# EAGLE board USB_Current_Sensor-Panel (EAGLE 9.6.2), part 1 of 2
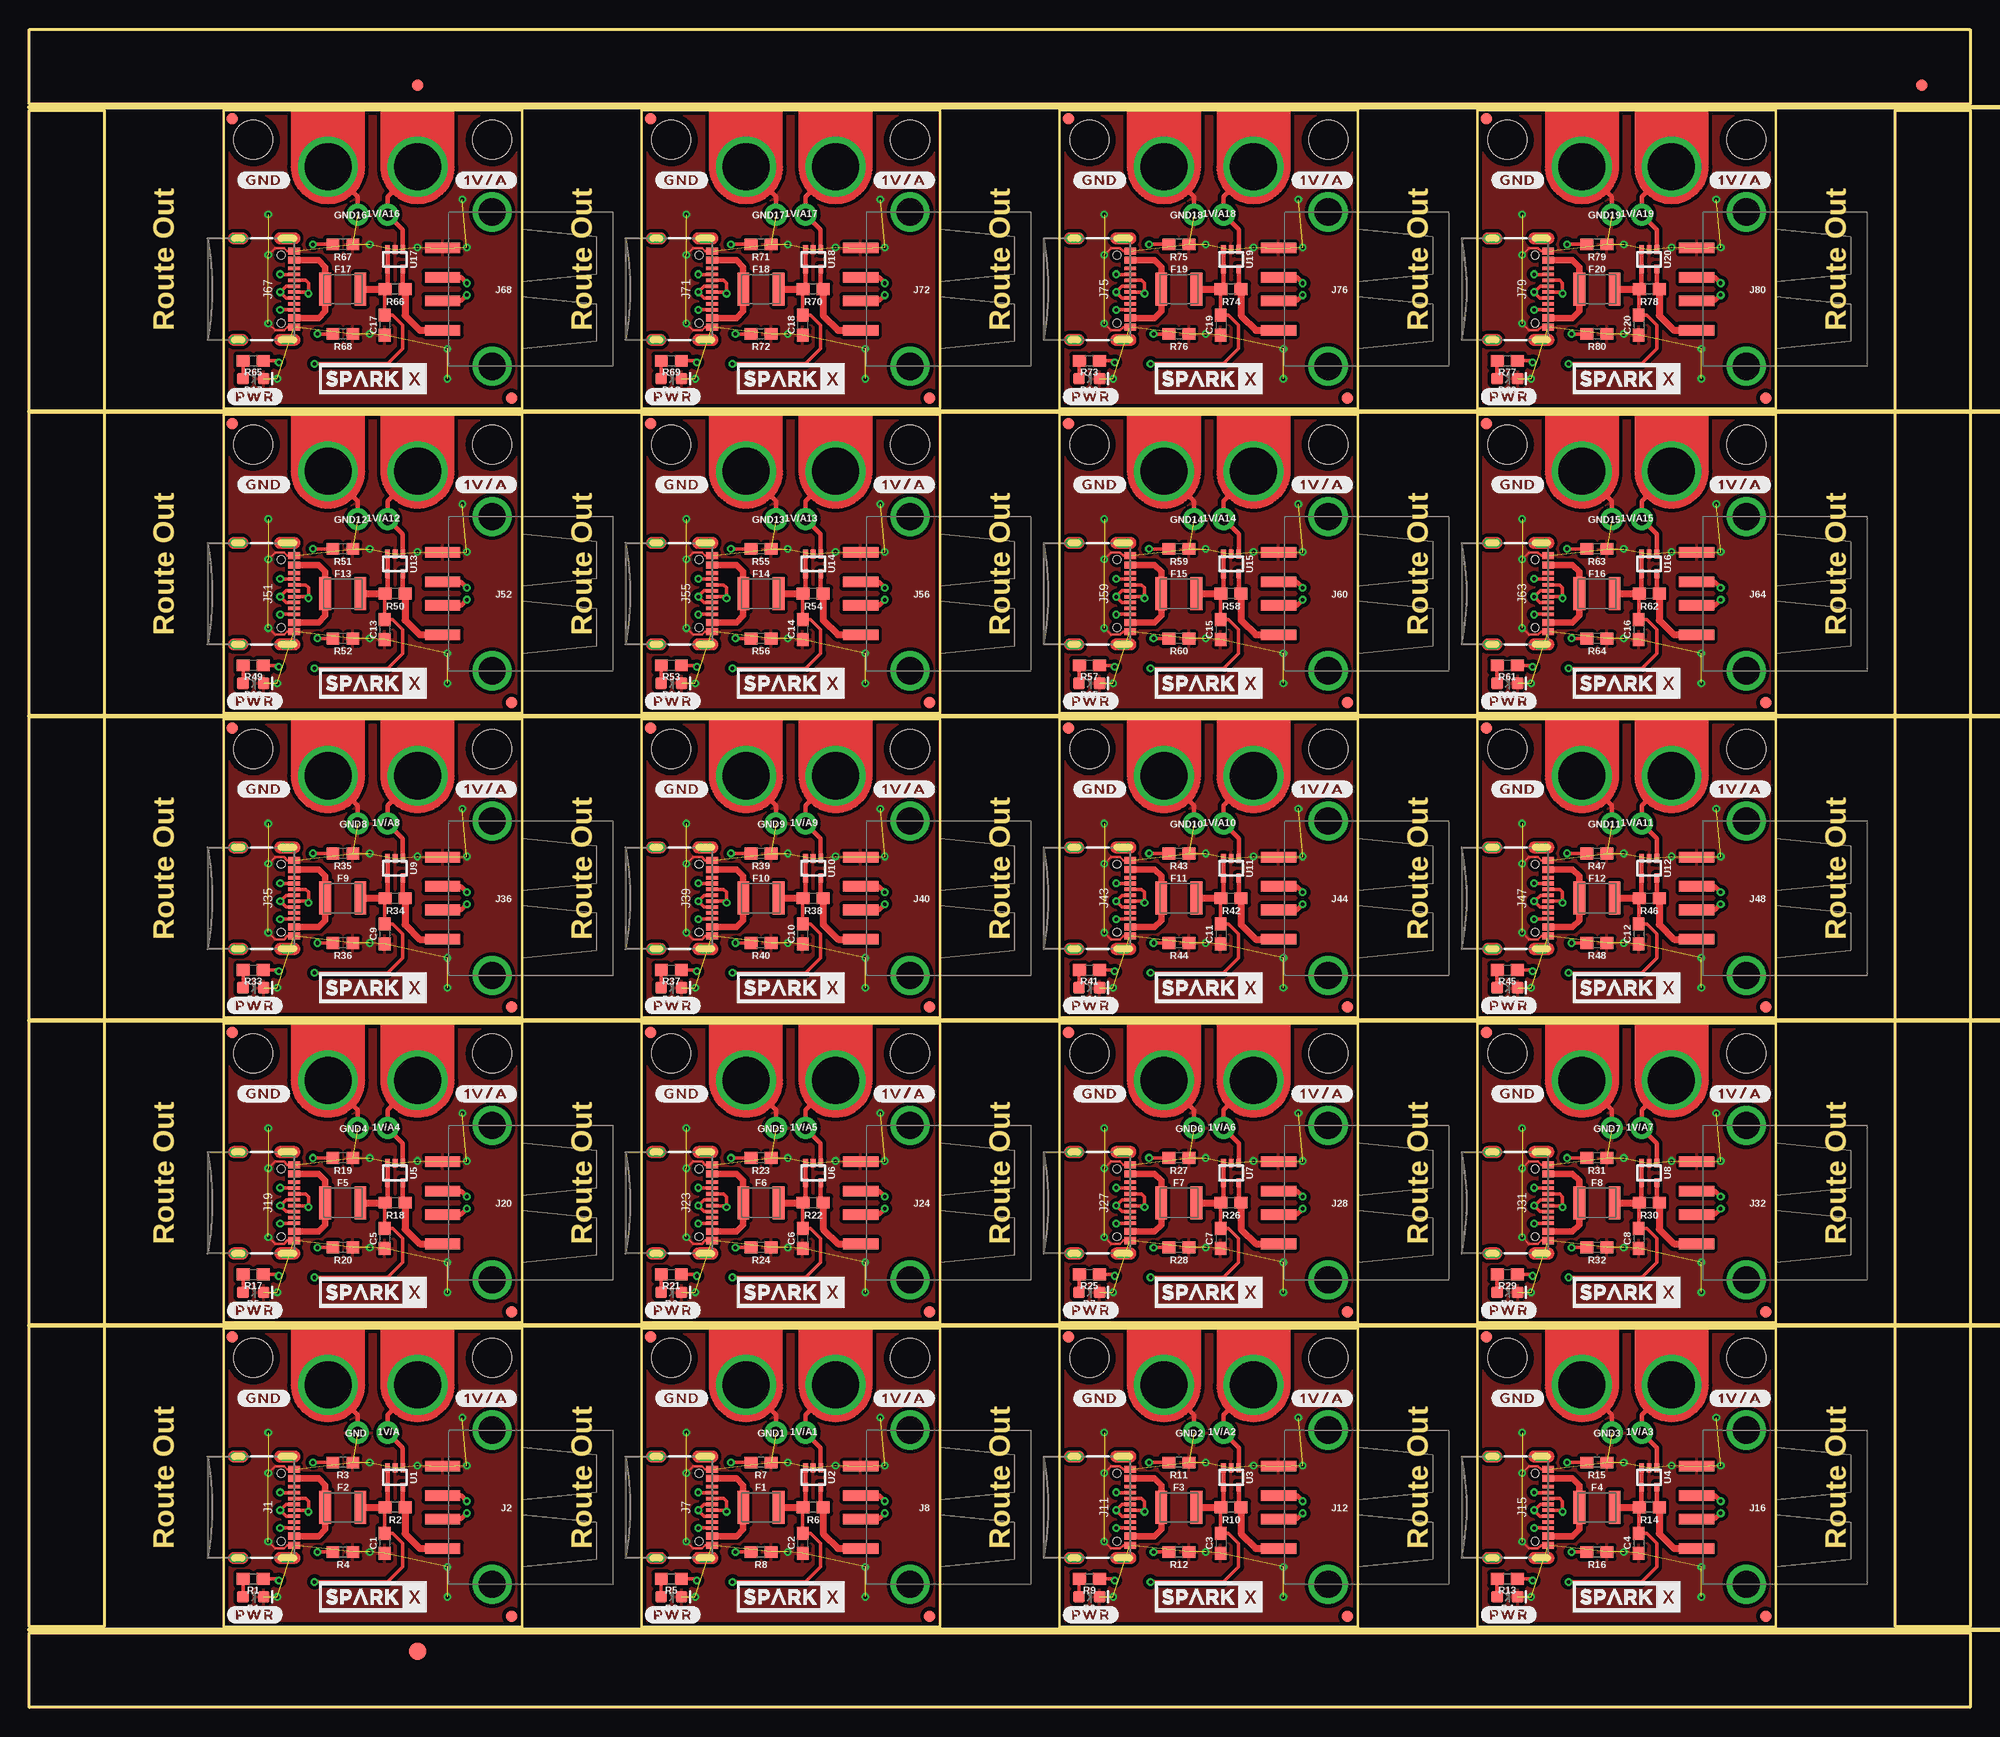
[diagram p0: board, top side]
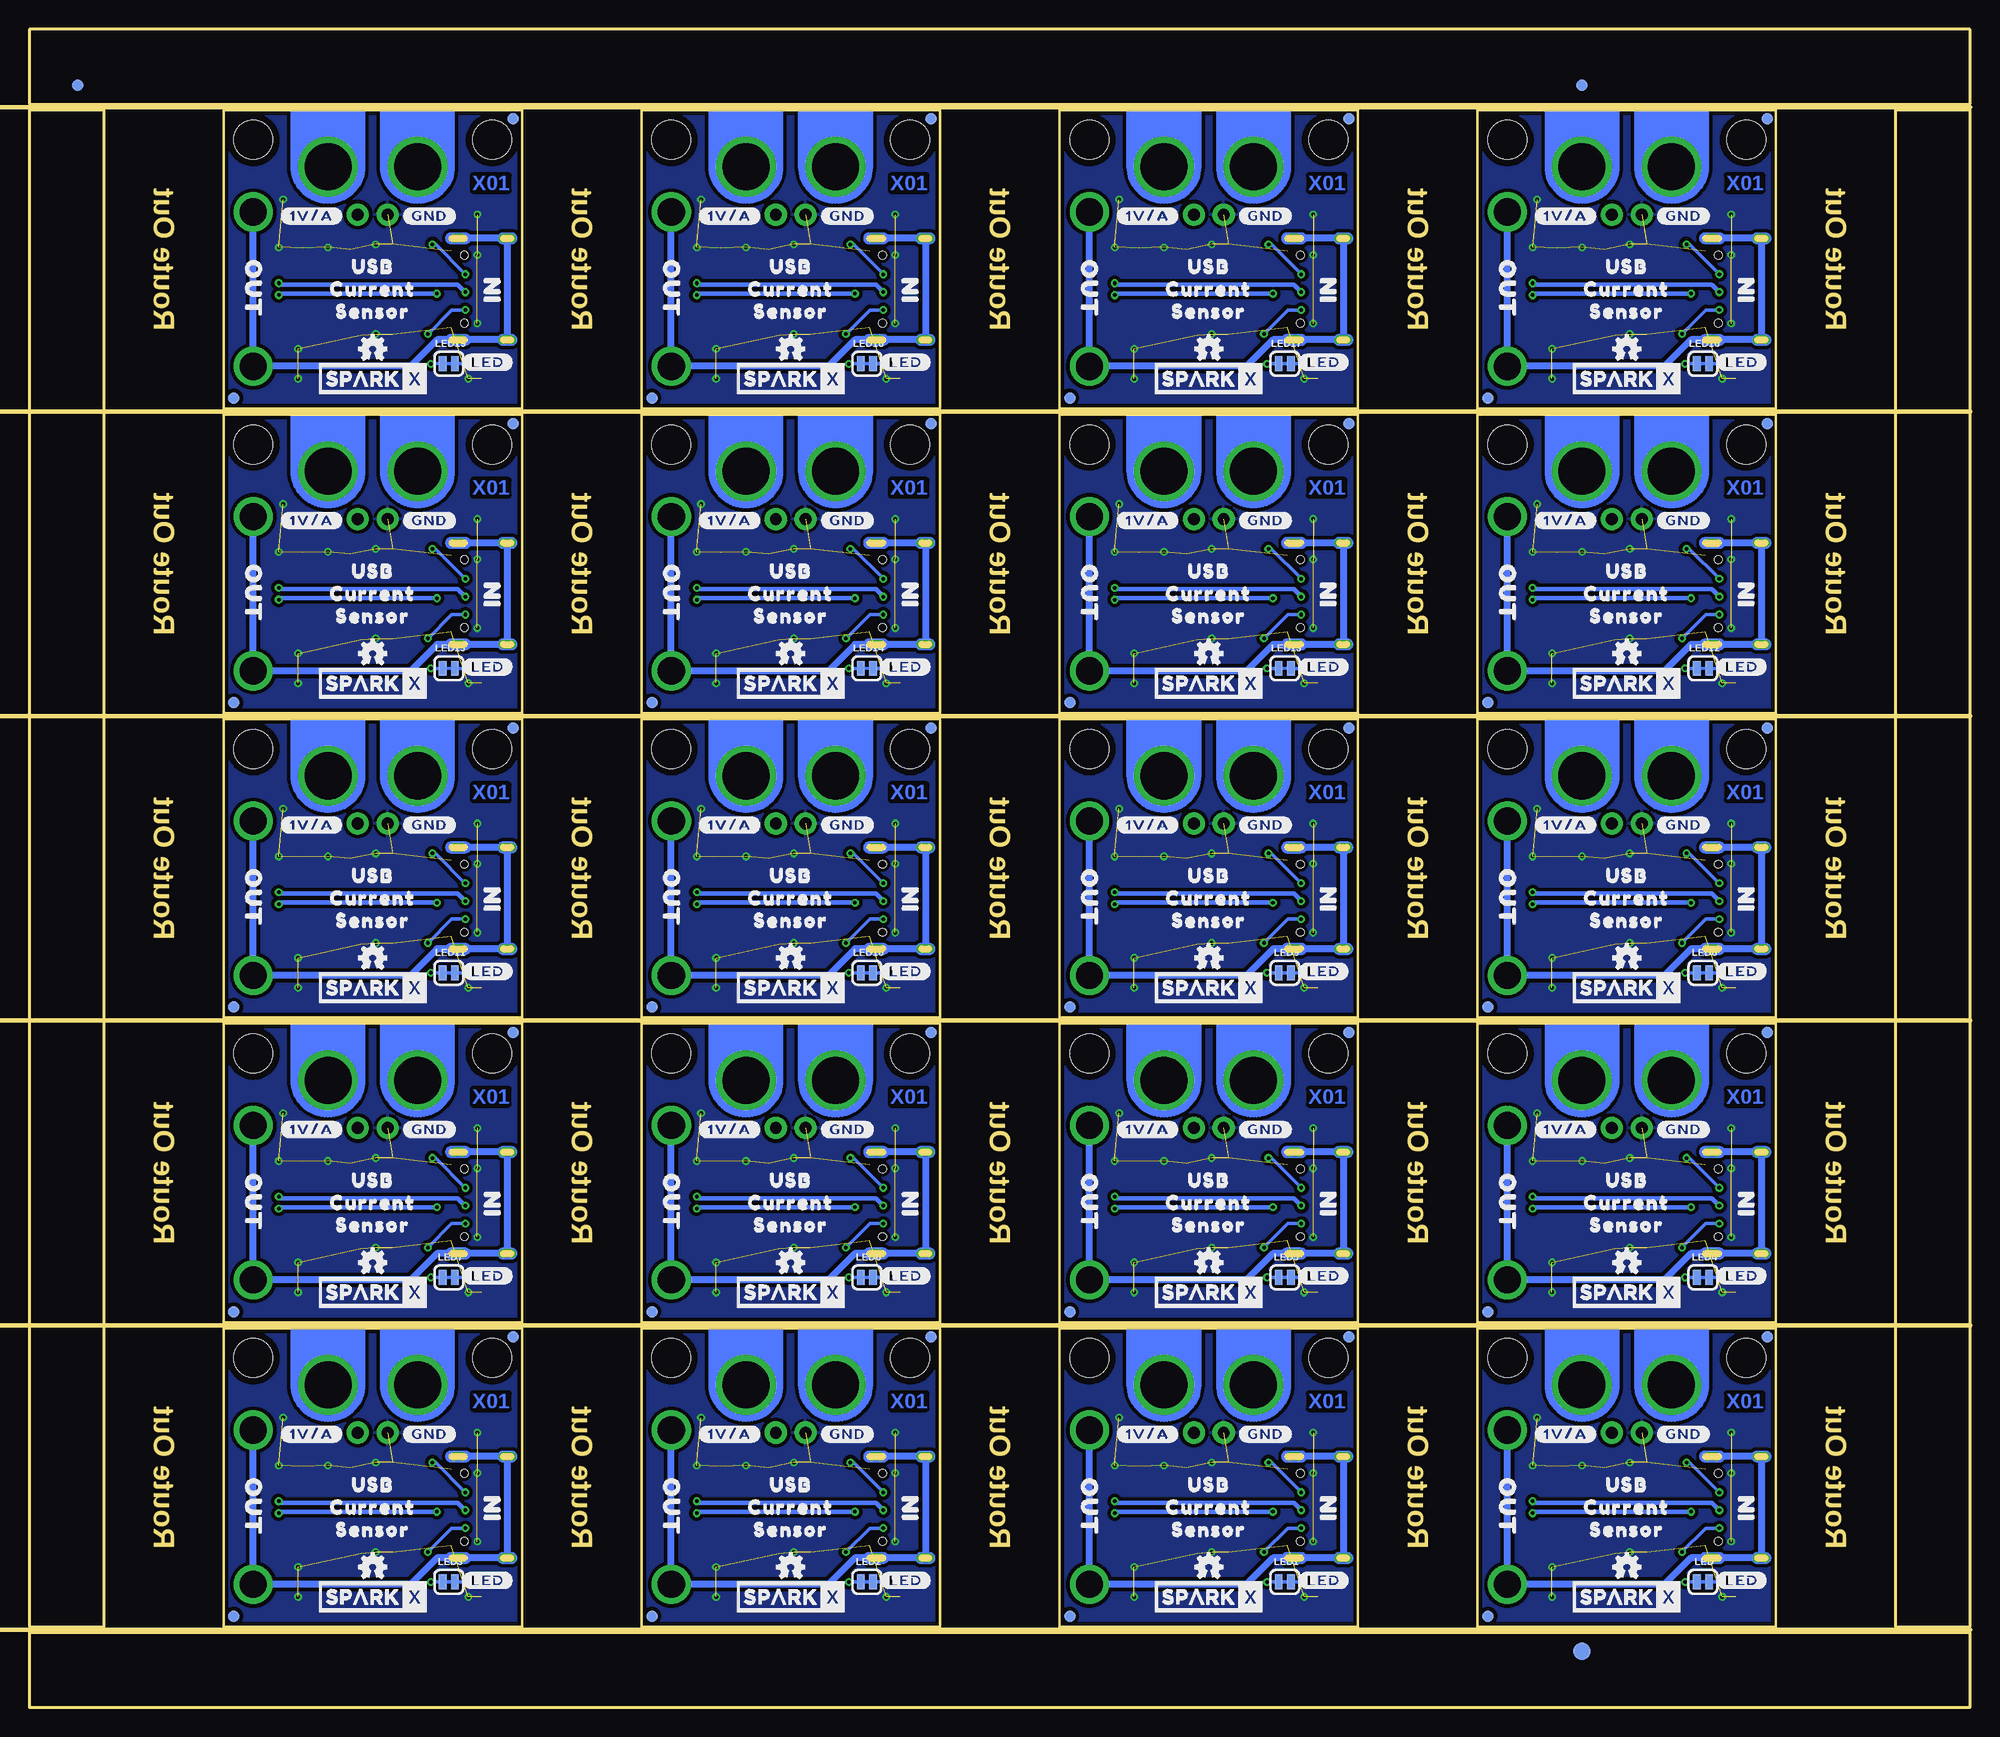
[diagram p1: board, bottom side, seen from below]

Size 165.1 x 142.75 mm. Coordinates in mm from the lower left corner, seen from the top.
Outline: 41.91,32.26 41.91,6.86 16.51,6.86 16.51,32.26 41.91,32.26
Outline: 77.47,32.26 77.47,6.86 52.07,6.86 52.07,32.26 77.47,32.26
Outline: 113.03,32.26 113.03,6.86 87.63,6.86 87.63,32.26 113.03,32.26
Outline: 148.59,32.26 148.59,6.86 123.19,6.86 123.19,32.26 148.59,32.26
Outline: 41.91,58.17 41.91,32.77 16.51,32.77 16.51,58.17 41.91,58.17
Outline: 77.47,58.17 77.47,32.77 52.07,32.77 52.07,58.17 77.47,58.17
Outline: 113.03,58.17 113.03,32.77 87.63,32.77 87.63,58.17 113.03,58.17
Outline: 148.59,58.17 148.59,32.77 123.19,32.77 123.19,58.17 148.59,58.17
Outline: 41.91,84.07 41.91,58.67 16.51,58.67 16.51,84.07 41.91,84.07
Outline: 77.47,84.07 77.47,58.67 52.07,58.67 52.07,84.07 77.47,84.07
Outline: 113.03,84.07 113.03,58.67 87.63,58.67 87.63,84.07 113.03,84.07
Outline: 148.59,84.07 148.59,58.67 123.19,58.67 123.19,84.07 148.59,84.07
Outline: 41.91,109.98 41.91,84.58 16.51,84.58 16.51,109.98 41.91,109.98
Outline: 77.47,109.98 77.47,84.58 52.07,84.58 52.07,109.98 77.47,109.98
Outline: 113.03,109.98 113.03,84.58 87.63,84.58 87.63,109.98 113.03,109.98
Outline: 148.59,109.98 148.59,84.58 123.19,84.58 123.19,109.98 148.59,109.98
Outline: 41.91,135.89 41.91,110.49 16.51,110.49 16.51,135.89 41.91,135.89
Outline: 77.47,135.89 77.47,110.49 52.07,110.49 52.07,135.89 77.47,135.89
Outline: 113.03,135.89 113.03,110.49 87.63,110.49 87.63,135.89 113.03,135.89
Outline: 148.59,135.89 148.59,110.49 123.19,110.49 123.19,135.89 148.59,135.89
Outline: 0,6.35 165.1,6.35 165.1,0 0,0 0,6.35
Outline: 158.75,135.89 165.1,135.89 165.1,6.86 158.75,6.86 158.75,135.89
Outline: 0,142.75 165.1,142.75 165.1,136.4 0,136.4 0,142.75
Outline: 0,135.89 6.35,135.89 6.35,6.86 0,6.86 0,135.89
Copper layers (1*16): Top 0.035mm / dielectric 1.5mm / Bottom 0.035mm
Design rules "USB_Current_Sensor": minimum track width 7mil, minimum drill 0.3mm, track to track 7mil, track to pad 7mil, pad to pad 7mil, via to via 7mil, smd to smd 7mil, copper to edge 7mil, drill to drill 7mil, minimum pad ring 7mil, minimum via ring 7mil, stop-mask expansion 3mil, vias tented up to drill 25mil, thermal gap 10mil
Milling: 6 lines

## Footprints (pad centres in the part's own frame; a part is rotated, then mirrored left to right if it is on the bottom)
1X01_NO_SILK = drill 1.016 pad 1.88: 1 0,0
0603 = smd 1.1 x 1: 1 -0.85,0; 2 0.85,0
LED-0603 = smd 1 x 1: A -0.877,0; C 0.877,0
FIDUCIAL-1X2 = smd 1 x 1: 1 0,0
FIDUCIAL-1.5X3 = smd 1.5 x 1.5: 1 0,0
1210 = smd 1 x 2.8: 1 -1.5,0; 2 1.5,0
USB-C-16P_4LAYER-PADS = smd 0.3 x 1: A5 -1.25,-0.34; A6 -0.25,-0.34; A7 0.25,-0.34; A8 1.25,-0.34; B5 1.75,-0.34; B6 0.75,-0.34; B7 -0.75,-0.34; B8 -1.75,-0.34 | smd 0.6 x 1: GND -3.225,-0.34; GND2 3.225,-0.34; VBUS1 -2.45,-0.34; VBUS2 2.45,-0.34 | drill 0.4 pad 0.6 long: SHLD1 -4.318,-0.915; SHLD2 4.318,-0.915; SHLD3 -4.318,-5.095; SHLD4 4.318,-5.095 | hole 0.65: -2.89,-1.445; 2.89,-1.445
USB-A-S-NOSILK-FEMALE = smd 3 x 0.9: D+ 6.752,-1; D- 6.752,1; GND 6.752,-3.5; VBUS 6.752,3.5 | drill 2.311: SHLD1 2.54,-6.566; SHLD2 2.54,6.566
TAB_GATOR_MINI = drill 4 pad 5.08: P1 0,4.826
STAND-OFF = hole 3.302: 0,0
SMT-JUMPER_2_NC_TRACE_SILK = smd 0.66 x 1.27: 1 -0.521,0; 2 0.521,0
SC70 = smd 0.4 x 0.75: 1 -0.65,-0.825; 2 0,-0.825; 3 0.65,-0.825; 4 0.65,0.825; 5 -0.65,0.825

## Placement (x,y rotation side)
1V/A  [1X01_NO_SILK]  30.48,23.37 180 top
1V/A1  [1X01_NO_SILK]  66.04,23.37 180 top
1V/A2  [1X01_NO_SILK]  101.6,23.37 180 top
1V/A3  [1X01_NO_SILK]  137.16,23.37 180 top
1V/A4  [1X01_NO_SILK]  30.48,49.28 180 top
1V/A5  [1X01_NO_SILK]  66.04,49.28 180 top
1V/A6  [1X01_NO_SILK]  101.6,49.28 180 top
1V/A7  [1X01_NO_SILK]  137.16,49.28 180 top
1V/A8  [1X01_NO_SILK]  30.48,75.18 180 top
1V/A9  [1X01_NO_SILK]  66.04,75.18 180 top
1V/A10  [1X01_NO_SILK]  101.6,75.18 180 top
1V/A11  [1X01_NO_SILK]  137.16,75.18 180 top
1V/A12  [1X01_NO_SILK]  30.48,101.09 180 top
1V/A13  [1X01_NO_SILK]  66.04,101.09 180 top
1V/A14  [1X01_NO_SILK]  101.6,101.09 180 top
1V/A15  [1X01_NO_SILK]  137.16,101.09 180 top
1V/A16  [1X01_NO_SILK]  30.48,127 180 top
1V/A17  [1X01_NO_SILK]  66.04,127 180 top
1V/A18  [1X01_NO_SILK]  101.6,127 180 top
1V/A19  [1X01_NO_SILK]  137.16,127 180 top
C1  0.1uF  [0603]  30.23,13.97 270 top
C2  0.1uF  [0603]  65.79,13.97 270 top
C3  0.1uF  [0603]  101.35,13.97 270 top
C4  0.1uF  [0603]  136.91,13.97 270 top
C5  0.1uF  [0603]  30.23,39.88 270 top
C6  0.1uF  [0603]  65.79,39.88 270 top
C7  0.1uF  [0603]  101.35,39.88 270 top
C8  0.1uF  [0603]  136.91,39.88 270 top
C9  0.1uF  [0603]  30.23,65.79 270 top
C10  0.1uF  [0603]  65.79,65.79 270 top
C11  0.1uF  [0603]  101.35,65.79 270 top
C12  0.1uF  [0603]  136.91,65.79 270 top
C13  0.1uF  [0603]  30.23,91.69 270 top
C14  0.1uF  [0603]  65.79,91.69 270 top
C15  0.1uF  [0603]  101.35,91.69 270 top
C16  0.1uF  [0603]  136.91,91.69 270 top
C17  0.1uF  [0603]  30.23,117.6 270 top
C18  0.1uF  [0603]  65.79,117.6 270 top
C19  0.1uF  [0603]  101.35,117.6 270 top
C20  0.1uF  [0603]  136.91,117.6 270 top
D1  RED  [LED-0603]  19.05,9.4 0 top
D2  RED  [LED-0603]  54.61,9.4 0 top
D3  RED  [LED-0603]  90.17,9.4 0 top
D4  RED  [LED-0603]  125.73,9.4 0 top
D5  RED  [LED-0603]  19.05,35.31 0 top
D6  RED  [LED-0603]  54.61,35.31 0 top
D7  RED  [LED-0603]  90.17,35.31 0 top
D8  RED  [LED-0603]  125.73,35.31 0 top
D9  RED  [LED-0603]  19.05,61.21 0 top
D10  RED  [LED-0603]  54.61,61.21 0 top
D11  RED  [LED-0603]  90.17,61.21 0 top
D12  RED  [LED-0603]  125.73,61.21 0 top
D13  RED  [LED-0603]  19.05,87.12 0 top
D14  RED  [LED-0603]  54.61,87.12 0 top
D15  RED  [LED-0603]  90.17,87.12 0 top
D16  RED  [LED-0603]  125.73,87.12 0 top
D17  RED  [LED-0603]  19.05,113.03 0 top
D18  RED  [LED-0603]  54.61,113.03 0 top
D19  RED  [LED-0603]  90.17,113.03 0 top
D20  RED  [LED-0603]  125.73,113.03 0 top
E$1  [FIDUCIAL-1X2]  33.02,137.99 0 top
E$2  [FIDUCIAL-1X2]  33.02,137.99 0 bottom
E$3  [FIDUCIAL-1X2]  160.97,137.99 0 top
E$4  [FIDUCIAL-1X2]  160.97,137.99 0 bottom
E$5  [FIDUCIAL-1.5X3]  33.02,4.76 0 top
E$6  [FIDUCIAL-1.5X3]  33.02,4.76 0 bottom
F1  6V/2A  [1210]  62.23,17.02 0 top
F2  6V/2A  [1210]  26.67,17.02 0 top
F3  6V/2A  [1210]  97.79,17.02 0 top
F4  6V/2A  [1210]  133.35,17.02 0 top
F5  6V/2A  [1210]  26.67,42.93 0 top
F6  6V/2A  [1210]  62.23,42.93 0 top
F7  6V/2A  [1210]  97.79,42.93 0 top
F8  6V/2A  [1210]  133.35,42.93 0 top
F9  6V/2A  [1210]  26.67,68.83 0 top
F10  6V/2A  [1210]  62.23,68.83 0 top
F11  6V/2A  [1210]  97.79,68.83 0 top
F12  6V/2A  [1210]  133.35,68.83 0 top
F13  6V/2A  [1210]  26.67,94.74 0 top
F14  6V/2A  [1210]  62.23,94.74 0 top
F15  6V/2A  [1210]  97.79,94.74 0 top
F16  6V/2A  [1210]  133.35,94.74 0 top
F17  6V/2A  [1210]  26.67,120.65 0 top
F18  6V/2A  [1210]  62.23,120.65 0 top
F19  6V/2A  [1210]  97.79,120.65 0 top
F20  6V/2A  [1210]  133.35,120.65 0 top
GND  [1X01_NO_SILK]  27.94,23.37 180 top
GND1  [1X01_NO_SILK]  63.5,23.37 180 top
GND2  [1X01_NO_SILK]  99.06,23.37 180 top
GND3  [1X01_NO_SILK]  134.62,23.37 180 top
GND4  [1X01_NO_SILK]  27.94,49.28 180 top
GND5  [1X01_NO_SILK]  63.5,49.28 180 top
GND6  [1X01_NO_SILK]  99.06,49.28 180 top
GND7  [1X01_NO_SILK]  134.62,49.28 180 top
GND8  [1X01_NO_SILK]  27.94,75.18 180 top
GND9  [1X01_NO_SILK]  63.5,75.18 180 top
GND10  [1X01_NO_SILK]  99.06,75.18 180 top
GND11  [1X01_NO_SILK]  134.62,75.18 180 top
GND12  [1X01_NO_SILK]  27.94,101.09 180 top
GND13  [1X01_NO_SILK]  63.5,101.09 180 top
GND14  [1X01_NO_SILK]  99.06,101.09 180 top
GND15  [1X01_NO_SILK]  134.62,101.09 180 top
GND16  [1X01_NO_SILK]  27.94,127 180 top
GND17  [1X01_NO_SILK]  63.5,127 180 top
GND18  [1X01_NO_SILK]  99.06,127 180 top
GND19  [1X01_NO_SILK]  134.62,127 180 top
J1  [USB-C-16P_4LAYER-PADS]  22.86,17.02 270 top
J2  USB_A_FEMALE  [USB-A-S-NOSILK-FEMALE]  41.91,17.02 180 top
J3  TAB_GATOR_MINI  [TAB_GATOR_MINI]  33.02,32.26 180 top
J4  TAB_GATOR_MINI  [TAB_GATOR_MINI]  25.4,32.26 180 top
J5  TAB_GATOR_MINI  [TAB_GATOR_MINI]  68.58,32.26 180 top
J6  TAB_GATOR_MINI  [TAB_GATOR_MINI]  60.96,32.26 180 top
J7  [USB-C-16P_4LAYER-PADS]  58.42,17.02 270 top
J8  USB_A_FEMALE  [USB-A-S-NOSILK-FEMALE]  77.47,17.02 180 top
J9  TAB_GATOR_MINI  [TAB_GATOR_MINI]  104.14,32.26 180 top
J10  TAB_GATOR_MINI  [TAB_GATOR_MINI]  96.52,32.26 180 top
J11  [USB-C-16P_4LAYER-PADS]  93.98,17.02 270 top
J12  USB_A_FEMALE  [USB-A-S-NOSILK-FEMALE]  113.03,17.02 180 top
J13  TAB_GATOR_MINI  [TAB_GATOR_MINI]  139.7,32.26 180 top
J14  TAB_GATOR_MINI  [TAB_GATOR_MINI]  132.08,32.26 180 top
J15  [USB-C-16P_4LAYER-PADS]  129.54,17.02 270 top
J16  USB_A_FEMALE  [USB-A-S-NOSILK-FEMALE]  148.59,17.02 180 top
J17  TAB_GATOR_MINI  [TAB_GATOR_MINI]  33.02,58.17 180 top
J18  TAB_GATOR_MINI  [TAB_GATOR_MINI]  25.4,58.17 180 top
J19  [USB-C-16P_4LAYER-PADS]  22.86,42.93 270 top
J20  USB_A_FEMALE  [USB-A-S-NOSILK-FEMALE]  41.91,42.93 180 top
J21  TAB_GATOR_MINI  [TAB_GATOR_MINI]  68.58,58.17 180 top
J22  TAB_GATOR_MINI  [TAB_GATOR_MINI]  60.96,58.17 180 top
J23  [USB-C-16P_4LAYER-PADS]  58.42,42.93 270 top
J24  USB_A_FEMALE  [USB-A-S-NOSILK-FEMALE]  77.47,42.93 180 top
J25  TAB_GATOR_MINI  [TAB_GATOR_MINI]  104.14,58.17 180 top
J26  TAB_GATOR_MINI  [TAB_GATOR_MINI]  96.52,58.17 180 top
J27  [USB-C-16P_4LAYER-PADS]  93.98,42.93 270 top
J28  USB_A_FEMALE  [USB-A-S-NOSILK-FEMALE]  113.03,42.93 180 top
J29  TAB_GATOR_MINI  [TAB_GATOR_MINI]  139.7,58.17 180 top
J30  TAB_GATOR_MINI  [TAB_GATOR_MINI]  132.08,58.17 180 top
J31  [USB-C-16P_4LAYER-PADS]  129.54,42.93 270 top
J32  USB_A_FEMALE  [USB-A-S-NOSILK-FEMALE]  148.59,42.93 180 top
J33  TAB_GATOR_MINI  [TAB_GATOR_MINI]  33.02,84.07 180 top
J34  TAB_GATOR_MINI  [TAB_GATOR_MINI]  25.4,84.07 180 top
J35  [USB-C-16P_4LAYER-PADS]  22.86,68.83 270 top
J36  USB_A_FEMALE  [USB-A-S-NOSILK-FEMALE]  41.91,68.83 180 top
J37  TAB_GATOR_MINI  [TAB_GATOR_MINI]  68.58,84.07 180 top
J38  TAB_GATOR_MINI  [TAB_GATOR_MINI]  60.96,84.07 180 top
J39  [USB-C-16P_4LAYER-PADS]  58.42,68.83 270 top
J40  USB_A_FEMALE  [USB-A-S-NOSILK-FEMALE]  77.47,68.83 180 top
J41  TAB_GATOR_MINI  [TAB_GATOR_MINI]  104.14,84.07 180 top
J42  TAB_GATOR_MINI  [TAB_GATOR_MINI]  96.52,84.07 180 top
J43  [USB-C-16P_4LAYER-PADS]  93.98,68.83 270 top
J44  USB_A_FEMALE  [USB-A-S-NOSILK-FEMALE]  113.03,68.83 180 top
J45  TAB_GATOR_MINI  [TAB_GATOR_MINI]  139.7,84.07 180 top
J46  TAB_GATOR_MINI  [TAB_GATOR_MINI]  132.08,84.07 180 top
J47  [USB-C-16P_4LAYER-PADS]  129.54,68.83 270 top
J48  USB_A_FEMALE  [USB-A-S-NOSILK-FEMALE]  148.59,68.83 180 top
J49  TAB_GATOR_MINI  [TAB_GATOR_MINI]  33.02,109.98 180 top
J50  TAB_GATOR_MINI  [TAB_GATOR_MINI]  25.4,109.98 180 top
J51  [USB-C-16P_4LAYER-PADS]  22.86,94.74 270 top
J52  USB_A_FEMALE  [USB-A-S-NOSILK-FEMALE]  41.91,94.74 180 top
J53  TAB_GATOR_MINI  [TAB_GATOR_MINI]  68.58,109.98 180 top
J54  TAB_GATOR_MINI  [TAB_GATOR_MINI]  60.96,109.98 180 top
J55  [USB-C-16P_4LAYER-PADS]  58.42,94.74 270 top
J56  USB_A_FEMALE  [USB-A-S-NOSILK-FEMALE]  77.47,94.74 180 top
J57  TAB_GATOR_MINI  [TAB_GATOR_MINI]  104.14,109.98 180 top
J58  TAB_GATOR_MINI  [TAB_GATOR_MINI]  96.52,109.98 180 top
J59  [USB-C-16P_4LAYER-PADS]  93.98,94.74 270 top
J60  USB_A_FEMALE  [USB-A-S-NOSILK-FEMALE]  113.03,94.74 180 top
J61  TAB_GATOR_MINI  [TAB_GATOR_MINI]  139.7,109.98 180 top
J62  TAB_GATOR_MINI  [TAB_GATOR_MINI]  132.08,109.98 180 top
J63  [USB-C-16P_4LAYER-PADS]  129.54,94.74 270 top
J64  USB_A_FEMALE  [USB-A-S-NOSILK-FEMALE]  148.59,94.74 180 top
J65  TAB_GATOR_MINI  [TAB_GATOR_MINI]  33.02,135.89 180 top
J66  TAB_GATOR_MINI  [TAB_GATOR_MINI]  25.4,135.89 180 top
J67  [USB-C-16P_4LAYER-PADS]  22.86,120.65 270 top
J68  USB_A_FEMALE  [USB-A-S-NOSILK-FEMALE]  41.91,120.65 180 top
J69  TAB_GATOR_MINI  [TAB_GATOR_MINI]  68.58,135.89 180 top
J70  TAB_GATOR_MINI  [TAB_GATOR_MINI]  60.96,135.89 180 top
J71  [USB-C-16P_4LAYER-PADS]  58.42,120.65 270 top
J72  USB_A_FEMALE  [USB-A-S-NOSILK-FEMALE]  77.47,120.65 180 top
J73  TAB_GATOR_MINI  [TAB_GATOR_MINI]  104.14,135.89 180 top
J74  TAB_GATOR_MINI  [TAB_GATOR_MINI]  96.52,135.89 180 top
J75  [USB-C-16P_4LAYER-PADS]  93.98,120.65 270 top
J76  USB_A_FEMALE  [USB-A-S-NOSILK-FEMALE]  113.03,120.65 180 top
J77  TAB_GATOR_MINI  [TAB_GATOR_MINI]  139.7,135.89 180 top
J78  TAB_GATOR_MINI  [TAB_GATOR_MINI]  132.08,135.89 180 top
J79  [USB-C-16P_4LAYER-PADS]  129.54,120.65 270 top
J80  USB_A_FEMALE  [USB-A-S-NOSILK-FEMALE]  148.59,120.65 180 top
JP1  FIDUCIAL1X2  [FIDUCIAL-1X2]  17.27,31.5 0 bottom
JP2  FIDUCIAL1X2  [FIDUCIAL-1X2]  41.02,7.75 0 top
JP3  STAND-OFF  [STAND-OFF]  39.37,29.72 180 top
JP4  STAND-OFF  [STAND-OFF]  19.05,29.72 180 top
JP5  FIDUCIAL1X2  [FIDUCIAL-1X2]  41.02,7.75 0 bottom
JP6  FIDUCIAL1X2  [FIDUCIAL-1X2]  17.27,31.5 0 top
JP7  STAND-OFF  [STAND-OFF]  74.93,29.72 180 top
JP8  STAND-OFF  [STAND-OFF]  54.61,29.72 180 top
JP9  FIDUCIAL1X2  [FIDUCIAL-1X2]  76.58,7.75 0 top
JP10  FIDUCIAL1X2  [FIDUCIAL-1X2]  52.83,31.5 0 top
JP11  FIDUCIAL1X2  [FIDUCIAL-1X2]  52.83,31.5 0 bottom
JP12  FIDUCIAL1X2  [FIDUCIAL-1X2]  76.58,7.75 0 bottom
JP13  STAND-OFF  [STAND-OFF]  110.49,29.72 180 top
JP14  STAND-OFF  [STAND-OFF]  90.17,29.72 180 top
JP15  FIDUCIAL1X2  [FIDUCIAL-1X2]  112.14,7.75 0 top
JP16  FIDUCIAL1X2  [FIDUCIAL-1X2]  88.39,31.5 0 top
JP17  FIDUCIAL1X2  [FIDUCIAL-1X2]  88.39,31.5 0 bottom
JP18  FIDUCIAL1X2  [FIDUCIAL-1X2]  112.14,7.75 0 bottom
JP19  STAND-OFF  [STAND-OFF]  146.05,29.72 180 top
JP20  STAND-OFF  [STAND-OFF]  125.73,29.72 180 top
JP21  FIDUCIAL1X2  [FIDUCIAL-1X2]  147.7,7.75 0 top
JP22  FIDUCIAL1X2  [FIDUCIAL-1X2]  123.95,31.5 0 top
JP23  FIDUCIAL1X2  [FIDUCIAL-1X2]  123.95,31.5 0 bottom
JP24  FIDUCIAL1X2  [FIDUCIAL-1X2]  147.7,7.75 0 bottom
JP25  STAND-OFF  [STAND-OFF]  39.37,55.63 180 top
JP26  STAND-OFF  [STAND-OFF]  19.05,55.63 180 top
JP27  FIDUCIAL1X2  [FIDUCIAL-1X2]  41.02,33.66 0 top
JP28  FIDUCIAL1X2  [FIDUCIAL-1X2]  17.27,57.4 0 top
JP29  FIDUCIAL1X2  [FIDUCIAL-1X2]  17.27,57.4 0 bottom
JP30  FIDUCIAL1X2  [FIDUCIAL-1X2]  41.02,33.66 0 bottom
JP31  STAND-OFF  [STAND-OFF]  74.93,55.63 180 top
JP32  STAND-OFF  [STAND-OFF]  54.61,55.63 180 top
JP33  FIDUCIAL1X2  [FIDUCIAL-1X2]  76.58,33.66 0 top
JP34  FIDUCIAL1X2  [FIDUCIAL-1X2]  52.83,57.4 0 top
JP35  FIDUCIAL1X2  [FIDUCIAL-1X2]  52.83,57.4 0 bottom
JP36  FIDUCIAL1X2  [FIDUCIAL-1X2]  76.58,33.66 0 bottom
JP37  STAND-OFF  [STAND-OFF]  110.49,55.63 180 top
JP38  STAND-OFF  [STAND-OFF]  90.17,55.63 180 top
JP39  FIDUCIAL1X2  [FIDUCIAL-1X2]  112.14,33.66 0 top
JP40  FIDUCIAL1X2  [FIDUCIAL-1X2]  88.39,57.4 0 top
JP41  FIDUCIAL1X2  [FIDUCIAL-1X2]  88.39,57.4 0 bottom
JP42  FIDUCIAL1X2  [FIDUCIAL-1X2]  112.14,33.66 0 bottom
JP43  STAND-OFF  [STAND-OFF]  146.05,55.63 180 top
JP44  STAND-OFF  [STAND-OFF]  125.73,55.63 180 top
JP45  FIDUCIAL1X2  [FIDUCIAL-1X2]  147.7,33.66 0 top
JP46  FIDUCIAL1X2  [FIDUCIAL-1X2]  123.95,57.4 0 top
JP47  FIDUCIAL1X2  [FIDUCIAL-1X2]  123.95,57.4 0 bottom
JP48  FIDUCIAL1X2  [FIDUCIAL-1X2]  147.7,33.66 0 bottom
JP49  STAND-OFF  [STAND-OFF]  39.37,81.53 180 top
JP50  STAND-OFF  [STAND-OFF]  19.05,81.53 180 top
JP51  FIDUCIAL1X2  [FIDUCIAL-1X2]  41.02,59.56 0 top
JP52  FIDUCIAL1X2  [FIDUCIAL-1X2]  17.27,83.31 0 top
JP53  FIDUCIAL1X2  [FIDUCIAL-1X2]  17.27,83.31 0 bottom
JP54  FIDUCIAL1X2  [FIDUCIAL-1X2]  41.02,59.56 0 bottom
JP55  STAND-OFF  [STAND-OFF]  74.93,81.53 180 top
JP56  STAND-OFF  [STAND-OFF]  54.61,81.53 180 top
JP57  FIDUCIAL1X2  [FIDUCIAL-1X2]  76.58,59.56 0 top
JP58  FIDUCIAL1X2  [FIDUCIAL-1X2]  52.83,83.31 0 top
JP59  FIDUCIAL1X2  [FIDUCIAL-1X2]  52.83,83.31 0 bottom
JP60  FIDUCIAL1X2  [FIDUCIAL-1X2]  76.58,59.56 0 bottom
JP61  STAND-OFF  [STAND-OFF]  110.49,81.53 180 top
JP62  STAND-OFF  [STAND-OFF]  90.17,81.53 180 top
JP63  FIDUCIAL1X2  [FIDUCIAL-1X2]  112.14,59.56 0 top
JP64  FIDUCIAL1X2  [FIDUCIAL-1X2]  88.39,83.31 0 top
JP65  FIDUCIAL1X2  [FIDUCIAL-1X2]  88.39,83.31 0 bottom
JP66  FIDUCIAL1X2  [FIDUCIAL-1X2]  112.14,59.56 0 bottom
JP67  STAND-OFF  [STAND-OFF]  146.05,81.53 180 top
JP68  STAND-OFF  [STAND-OFF]  125.73,81.53 180 top
JP69  FIDUCIAL1X2  [FIDUCIAL-1X2]  147.7,59.56 0 top
JP70  FIDUCIAL1X2  [FIDUCIAL-1X2]  123.95,83.31 0 top
JP71  FIDUCIAL1X2  [FIDUCIAL-1X2]  123.95,83.31 0 bottom
JP72  FIDUCIAL1X2  [FIDUCIAL-1X2]  147.7,59.56 0 bottom
JP73  STAND-OFF  [STAND-OFF]  39.37,107.44 180 top
JP74  STAND-OFF  [STAND-OFF]  19.05,107.44 180 top
JP75  FIDUCIAL1X2  [FIDUCIAL-1X2]  41.02,85.47 0 top
JP76  FIDUCIAL1X2  [FIDUCIAL-1X2]  17.27,109.22 0 top
JP77  FIDUCIAL1X2  [FIDUCIAL-1X2]  17.27,109.22 0 bottom
JP78  FIDUCIAL1X2  [FIDUCIAL-1X2]  41.02,85.47 0 bottom
JP79  STAND-OFF  [STAND-OFF]  74.93,107.44 180 top
JP80  STAND-OFF  [STAND-OFF]  54.61,107.44 180 top
JP81  FIDUCIAL1X2  [FIDUCIAL-1X2]  76.58,85.47 0 top
JP82  FIDUCIAL1X2  [FIDUCIAL-1X2]  52.83,109.22 0 top
JP83  FIDUCIAL1X2  [FIDUCIAL-1X2]  52.83,109.22 0 bottom
JP84  FIDUCIAL1X2  [FIDUCIAL-1X2]  76.58,85.47 0 bottom
JP85  STAND-OFF  [STAND-OFF]  110.49,107.44 180 top
JP86  STAND-OFF  [STAND-OFF]  90.17,107.44 180 top
JP87  FIDUCIAL1X2  [FIDUCIAL-1X2]  112.14,85.47 0 top
JP88  FIDUCIAL1X2  [FIDUCIAL-1X2]  88.39,109.22 0 top
JP89  FIDUCIAL1X2  [FIDUCIAL-1X2]  88.39,109.22 0 bottom
JP90  FIDUCIAL1X2  [FIDUCIAL-1X2]  112.14,85.47 0 bottom
JP91  STAND-OFF  [STAND-OFF]  146.05,107.44 180 top
JP92  STAND-OFF  [STAND-OFF]  125.73,107.44 180 top
JP93  FIDUCIAL1X2  [FIDUCIAL-1X2]  147.7,85.47 0 top
JP94  FIDUCIAL1X2  [FIDUCIAL-1X2]  123.95,109.22 0 top
JP95  FIDUCIAL1X2  [FIDUCIAL-1X2]  123.95,109.22 0 bottom
JP96  FIDUCIAL1X2  [FIDUCIAL-1X2]  147.7,85.47 0 bottom
JP97  STAND-OFF  [STAND-OFF]  39.37,133.35 180 top
JP98  STAND-OFF  [STAND-OFF]  19.05,133.35 180 top
JP99  FIDUCIAL1X2  [FIDUCIAL-1X2]  41.02,111.38 0 top
JP100  FIDUCIAL1X2  [FIDUCIAL-1X2]  17.27,135.13 0 top
JP101  FIDUCIAL1X2  [FIDUCIAL-1X2]  17.27,135.13 0 bottom
JP102  FIDUCIAL1X2  [FIDUCIAL-1X2]  41.02,111.38 0 bottom
JP103  STAND-OFF  [STAND-OFF]  74.93,133.35 180 top
JP104  STAND-OFF  [STAND-OFF]  54.61,133.35 180 top
JP105  FIDUCIAL1X2  [FIDUCIAL-1X2]  76.58,111.38 0 top
JP106  FIDUCIAL1X2  [FIDUCIAL-1X2]  52.83,135.13 0 top
JP107  FIDUCIAL1X2  [FIDUCIAL-1X2]  52.83,135.13 0 bottom
JP108  FIDUCIAL1X2  [FIDUCIAL-1X2]  76.58,111.38 0 bottom
JP109  STAND-OFF  [STAND-OFF]  110.49,133.35 180 top
JP110  STAND-OFF  [STAND-OFF]  90.17,133.35 180 top
JP111  FIDUCIAL1X2  [FIDUCIAL-1X2]  112.14,111.38 0 top
JP112  FIDUCIAL1X2  [FIDUCIAL-1X2]  88.39,135.13 0 top
JP113  FIDUCIAL1X2  [FIDUCIAL-1X2]  88.39,135.13 0 bottom
JP114  FIDUCIAL1X2  [FIDUCIAL-1X2]  112.14,111.38 0 bottom
JP115  STAND-OFF  [STAND-OFF]  146.05,133.35 180 top
JP116  STAND-OFF  [STAND-OFF]  125.73,133.35 180 top
JP117  FIDUCIAL1X2  [FIDUCIAL-1X2]  147.7,111.38 0 top
JP118  FIDUCIAL1X2  [FIDUCIAL-1X2]  123.95,135.13 0 top
JP119  FIDUCIAL1X2  [FIDUCIAL-1X2]  123.95,135.13 0 bottom
JP120  FIDUCIAL1X2  [FIDUCIAL-1X2]  147.7,111.38 0 bottom
LED  [SMT-JUMPER_2_NC_TRACE_SILK]  22.73,10.67 180 bottom
LED1  [SMT-JUMPER_2_NC_TRACE_SILK]  58.29,10.67 180 bottom
LED2  [SMT-JUMPER_2_NC_TRACE_SILK]  93.85,10.67 180 bottom
LED3  [SMT-JUMPER_2_NC_TRACE_SILK]  129.41,10.67 180 bottom
LED4  [SMT-JUMPER_2_NC_TRACE_SILK]  22.73,36.58 180 bottom
LED5  [SMT-JUMPER_2_NC_TRACE_SILK]  58.29,36.58 180 bottom
LED6  [SMT-JUMPER_2_NC_TRACE_SILK]  93.85,36.58 180 bottom
LED7  [SMT-JUMPER_2_NC_TRACE_SILK]  129.41,36.58 180 bottom
LED8  [SMT-JUMPER_2_NC_TRACE_SILK]  22.73,62.48 180 bottom
LED9  [SMT-JUMPER_2_NC_TRACE_SILK]  58.29,62.48 180 bottom
LED10  [SMT-JUMPER_2_NC_TRACE_SILK]  93.85,62.48 180 bottom
LED11  [SMT-JUMPER_2_NC_TRACE_SILK]  129.41,62.48 180 bottom
LED12  [SMT-JUMPER_2_NC_TRACE_SILK]  22.73,88.39 180 bottom
LED13  [SMT-JUMPER_2_NC_TRACE_SILK]  58.29,88.39 180 bottom
LED14  [SMT-JUMPER_2_NC_TRACE_SILK]  93.85,88.39 180 bottom
LED15  [SMT-JUMPER_2_NC_TRACE_SILK]  129.41,88.39 180 bottom
LED16  [SMT-JUMPER_2_NC_TRACE_SILK]  22.73,114.3 180 bottom
LED17  [SMT-JUMPER_2_NC_TRACE_SILK]  58.29,114.3 180 bottom
LED18  [SMT-JUMPER_2_NC_TRACE_SILK]  93.85,114.3 180 bottom
LED19  [SMT-JUMPER_2_NC_TRACE_SILK]  129.41,114.3 180 bottom
LOGO1  OSHW-LOGOMINI  [OSHW-LOGO-MINI]  29.21,11.94 0 bottom
LOGO2  OSHW-LOGOMINI  [OSHW-LOGO-MINI]  64.77,11.94 0 bottom
LOGO3  OSHW-LOGOMINI  [OSHW-LOGO-MINI]  100.33,11.94 0 bottom
LOGO4  OSHW-LOGOMINI  [OSHW-LOGO-MINI]  135.89,11.94 0 bottom
LOGO5  OSHW-LOGOMINI  [OSHW-LOGO-MINI]  29.21,37.85 0 bottom
LOGO6  OSHW-LOGOMINI  [OSHW-LOGO-MINI]  64.77,37.85 0 bottom
LOGO7  OSHW-LOGOMINI  [OSHW-LOGO-MINI]  100.33,37.85 0 bottom
LOGO8  OSHW-LOGOMINI  [OSHW-LOGO-MINI]  135.89,37.85 0 bottom
LOGO9  OSHW-LOGOMINI  [OSHW-LOGO-MINI]  29.21,63.75 0 bottom
LOGO10  OSHW-LOGOMINI  [OSHW-LOGO-MINI]  64.77,63.75 0 bottom
LOGO11  OSHW-LOGOMINI  [OSHW-LOGO-MINI]  100.33,63.75 0 bottom
LOGO12  OSHW-LOGOMINI  [OSHW-LOGO-MINI]  135.89,63.75 0 bottom
LOGO13  OSHW-LOGOMINI  [OSHW-LOGO-MINI]  29.21,89.66 0 bottom
LOGO14  OSHW-LOGOMINI  [OSHW-LOGO-MINI]  64.77,89.66 0 bottom
LOGO15  OSHW-LOGOMINI  [OSHW-LOGO-MINI]  100.33,89.66 0 bottom
LOGO16  OSHW-LOGOMINI  [OSHW-LOGO-MINI]  135.89,89.66 0 bottom
LOGO17  OSHW-LOGOMINI  [OSHW-LOGO-MINI]  29.21,115.57 0 bottom
LOGO18  OSHW-LOGOMINI  [OSHW-LOGO-MINI]  64.77,115.57 0 bottom
LOGO19  OSHW-LOGOMINI  [OSHW-LOGO-MINI]  100.33,115.57 0 bottom
LOGO20  OSHW-LOGOMINI  [OSHW-LOGO-MINI]  135.89,115.57 0 bottom
R1  2.2k  [0603]  19.05,10.92 0 top
R2  0.05  [0603]  31.12,17.02 180 top
R3  5.1k  [0603]  26.67,20.83 180 top
R4  5.1k  [0603]  26.67,13.21 180 top
R5  2.2k  [0603]  54.61,10.92 0 top
R6  0.05  [0603]  66.67,17.02 180 top
R7  5.1k  [0603]  62.23,20.83 180 top
R8  5.1k  [0603]  62.23,13.21 180 top
R9  2.2k  [0603]  90.17,10.92 0 top
R10  0.05  [0603]  102.23,17.02 180 top
R11  5.1k  [0603]  97.79,20.83 180 top
R12  5.1k  [0603]  97.79,13.21 180 top
R13  2.2k  [0603]  125.73,10.92 0 top
R14  0.05  [0603]  137.79,17.02 180 top
R15  5.1k  [0603]  133.35,20.83 180 top
R16  5.1k  [0603]  133.35,13.21 180 top
R17  2.2k  [0603]  19.05,36.83 0 top
R18  0.05  [0603]  31.12,42.93 180 top
R19  5.1k  [0603]  26.67,46.74 180 top
R20  5.1k  [0603]  26.67,39.12 180 top
R21  2.2k  [0603]  54.61,36.83 0 top
R22  0.05  [0603]  66.67,42.93 180 top
R23  5.1k  [0603]  62.23,46.74 180 top
R24  5.1k  [0603]  62.23,39.12 180 top
R25  2.2k  [0603]  90.17,36.83 0 top
R26  0.05  [0603]  102.23,42.93 180 top
R27  5.1k  [0603]  97.79,46.74 180 top
R28  5.1k  [0603]  97.79,39.12 180 top
R29  2.2k  [0603]  125.73,36.83 0 top
R30  0.05  [0603]  137.79,42.93 180 top
R31  5.1k  [0603]  133.35,46.74 180 top
R32  5.1k  [0603]  133.35,39.12 180 top
R33  2.2k  [0603]  19.05,62.74 0 top
R34  0.05  [0603]  31.12,68.83 180 top
R35  5.1k  [0603]  26.67,72.64 180 top
R36  5.1k  [0603]  26.67,65.02 180 top
R37  2.2k  [0603]  54.61,62.74 0 top
R38  0.05  [0603]  66.67,68.83 180 top
R39  5.1k  [0603]  62.23,72.64 180 top
R40  5.1k  [0603]  62.23,65.02 180 top
R41  2.2k  [0603]  90.17,62.74 0 top
R42  0.05  [0603]  102.23,68.83 180 top
R43  5.1k  [0603]  97.79,72.64 180 top
R44  5.1k  [0603]  97.79,65.02 180 top
R45  2.2k  [0603]  125.73,62.74 0 top
R46  0.05  [0603]  137.79,68.83 180 top
R47  5.1k  [0603]  133.35,72.64 180 top
R48  5.1k  [0603]  133.35,65.02 180 top
R49  2.2k  [0603]  19.05,88.65 0 top
R50  0.05  [0603]  31.12,94.74 180 top
R51  5.1k  [0603]  26.67,98.55 180 top
R52  5.1k  [0603]  26.67,90.93 180 top
R53  2.2k  [0603]  54.61,88.65 0 top
R54  0.05  [0603]  66.67,94.74 180 top
R55  5.1k  [0603]  62.23,98.55 180 top
R56  5.1k  [0603]  62.23,90.93 180 top
R57  2.2k  [0603]  90.17,88.65 0 top
R58  0.05  [0603]  102.23,94.74 180 top
R59  5.1k  [0603]  97.79,98.55 180 top
R60  5.1k  [0603]  97.79,90.93 180 top
R61  2.2k  [0603]  125.73,88.65 0 top
R62  0.05  [0603]  137.79,94.74 180 top
R63  5.1k  [0603]  133.35,98.55 180 top
R64  5.1k  [0603]  133.35,90.93 180 top
R65  2.2k  [0603]  19.05,114.55 0 top
R66  0.05  [0603]  31.12,120.65 180 top
R67  5.1k  [0603]  26.67,124.46 180 top
R68  5.1k  [0603]  26.67,116.84 180 top
R69  2.2k  [0603]  54.61,114.55 0 top
R70  0.05  [0603]  66.67,120.65 180 top
R71  5.1k  [0603]  62.23,124.46 180 top
R72  5.1k  [0603]  62.23,116.84 180 top
R73  2.2k  [0603]  90.17,114.55 0 top
R74  0.05  [0603]  102.23,120.65 180 top
R75  5.1k  [0603]  97.79,124.46 180 top
R76  5.1k  [0603]  97.79,116.84 180 top
R77  2.2k  [0603]  125.73,114.55 0 top
R78  0.05  [0603]  137.79,120.65 180 top
R79  5.1k  [0603]  133.35,124.46 180 top
R80  5.1k  [0603]  133.35,116.84 180 top
U1  INA290A1(20V/V)  [SC70]  31.12,19.56 180 top
U2  INA290A1(20V/V)  [SC70]  66.67,19.56 180 top
U3  INA290A1(20V/V)  [SC70]  102.23,19.56 180 top
U4  INA290A1(20V/V)  [SC70]  137.79,19.56 180 top
U5  INA290A1(20V/V)  [SC70]  31.12,45.47 180 top
U6  INA290A1(20V/V)  [SC70]  66.67,45.47 180 top
U7  INA290A1(20V/V)  [SC70]  102.23,45.47 180 top
U8  INA290A1(20V/V)  [SC70]  137.79,45.47 180 top
U9  INA290A1(20V/V)  [SC70]  31.12,71.37 180 top
U10  INA290A1(20V/V)  [SC70]  66.67,71.37 180 top
U11  INA290A1(20V/V)  [SC70]  102.23,71.37 180 top
U12  INA290A1(20V/V)  [SC70]  137.79,71.37 180 top
U13  INA290A1(20V/V)  [SC70]  31.12,97.28 180 top
U14  INA290A1(20V/V)  [SC70]  66.67,97.28 180 top
U15  INA290A1(20V/V)  [SC70]  102.23,97.28 180 top
U16  INA290A1(20V/V)  [SC70]  137.79,97.28 180 top
U17  INA290A1(20V/V)  [SC70]  31.12,123.19 180 top
U18  INA290A1(20V/V)  [SC70]  66.67,123.19 180 top
U19  INA290A1(20V/V)  [SC70]  102.23,123.19 180 top
U20  INA290A1(20V/V)  [SC70]  137.79,123.19 180 top
U$1  SPARKX-LOGO4  [SPARKX-MEDIUM]  29.21,9.4 0 top
U$2  SPARKX-LOGO4  [SPARKX-MEDIUM]  29.21,9.4 0 bottom
U$3  [#GND#0]  19.94,26.29 0 top
U$4  [#GND#0]  24.38,23.24 0 bottom
U$5  [#1V#A#0]  38.86,26.29 0 top
U$6  [#1V#A#0]  34.42,23.24 0 bottom
U$7  [USB0]  29.21,18.92 0 bottom
U$8  [CURRENT0]  29.21,17.02 0 bottom
U$9  [SENSOR0]  29.21,15.11 0 bottom
U$10  [IN0]  19.05,17.02 90 bottom
U$11  [OUT0]  39.37,17.02 270 bottom
U$12  SPARKX-LOGO4  [SPARKX-MEDIUM]  64.77,9.4 0 bottom
U$13  [#PWR#0]  19.18,7.87 0 top
U$14  [#LED#0]  19.43,10.79 0 bottom
U$15  [#PWR#0]  54.74,7.87 0 top
U$16  [#LED#0]  54.99,10.79 0 bottom
U$17  SPARKX-LOGO4  [SPARKX-MEDIUM]  64.77,9.4 0 top
U$18  [#GND#0]  55.5,26.29 0 top
U$19  [#GND#0]  59.94,23.24 0 bottom
U$20  [#1V#A#0]  74.42,26.29 0 top
U$21  [#1V#A#0]  69.98,23.24 0 bottom
U$22  [USB0]  64.77,18.92 0 bottom
U$23  [CURRENT0]  64.77,17.02 0 bottom
U$24  [SENSOR0]  64.77,15.11 0 bottom
U$25  [IN0]  54.61,17.02 90 bottom
U$26  [OUT0]  74.93,17.02 270 bottom
U$27  SPARKX-LOGO4  [SPARKX-MEDIUM]  100.33,9.4 0 bottom
U$28  [#PWR#0]  90.3,7.87 0 top
U$29  [#LED#0]  90.55,10.79 0 bottom
U$30  SPARKX-LOGO4  [SPARKX-MEDIUM]  100.33,9.4 0 top
U$31  [#GND#0]  91.06,26.29 0 top
U$32  [#GND#0]  95.5,23.24 0 bottom
U$33  [#1V#A#0]  109.98,26.29 0 top
U$34  [#1V#A#0]  105.54,23.24 0 bottom
U$35  [USB0]  100.33,18.92 0 bottom
U$36  [CURRENT0]  100.33,17.02 0 bottom
U$37  [SENSOR0]  100.33,15.11 0 bottom
U$38  [IN0]  90.17,17.02 90 bottom
U$39  [OUT0]  110.49,17.02 270 bottom
U$40  SPARKX-LOGO4  [SPARKX-MEDIUM]  135.89,9.4 0 bottom
U$41  [#PWR#0]  125.86,7.87 0 top
U$42  [#LED#0]  126.11,10.79 0 bottom
U$43  SPARKX-LOGO4  [SPARKX-MEDIUM]  135.89,9.4 0 top
U$44  [#GND#0]  126.62,26.29 0 top
U$45  [#GND#0]  131.06,23.24 0 bottom
U$46  [#1V#A#0]  145.54,26.29 0 top
U$47  [#1V#A#0]  141.1,23.24 0 bottom
U$48  [USB0]  135.89,18.92 0 bottom
U$49  [CURRENT0]  135.89,17.02 0 bottom
U$50  [SENSOR0]  135.89,15.11 0 bottom
U$51  [IN0]  125.73,17.02 90 bottom
U$52  [OUT0]  146.05,17.02 270 bottom
U$53  SPARKX-LOGO4  [SPARKX-MEDIUM]  29.21,35.31 0 bottom
U$54  [#PWR#0]  19.18,33.78 0 top
U$55  [#LED#0]  19.43,36.7 0 bottom
U$56  SPARKX-LOGO4  [SPARKX-MEDIUM]  29.21,35.31 0 top
U$57  [#GND#0]  19.94,52.2 0 top
U$58  [#GND#0]  24.38,49.15 0 bottom
U$59  [#1V#A#0]  38.86,52.2 0 top
U$60  [#1V#A#0]  34.42,49.15 0 bottom
U$61  [USB0]  29.21,44.83 0 bottom
U$62  [CURRENT0]  29.21,42.93 0 bottom
U$63  [SENSOR0]  29.21,41.02 0 bottom
U$64  [IN0]  19.05,42.93 90 bottom
U$65  [OUT0]  39.37,42.93 270 bottom
U$66  SPARKX-LOGO4  [SPARKX-MEDIUM]  64.77,35.31 0 bottom
U$67  [#PWR#0]  54.74,33.78 0 top
U$68  [#LED#0]  54.99,36.7 0 bottom
U$69  SPARKX-LOGO4  [SPARKX-MEDIUM]  64.77,35.31 0 top
U$70  [#GND#0]  55.5,52.2 0 top
U$71  [#GND#0]  59.94,49.15 0 bottom
U$72  [#1V#A#0]  74.42,52.2 0 top
U$73  [#1V#A#0]  69.98,49.15 0 bottom
U$74  [USB0]  64.77,44.83 0 bottom
U$75  [CURRENT0]  64.77,42.93 0 bottom
U$76  [SENSOR0]  64.77,41.02 0 bottom
U$77  [IN0]  54.61,42.93 90 bottom
U$78  [OUT0]  74.93,42.93 270 bottom
U$79  SPARKX-LOGO4  [SPARKX-MEDIUM]  100.33,35.31 0 bottom
U$80  [#PWR#0]  90.3,33.78 0 top
U$81  [#LED#0]  90.55,36.7 0 bottom
U$82  SPARKX-LOGO4  [SPARKX-MEDIUM]  100.33,35.31 0 top
U$83  [#GND#0]  91.06,52.2 0 top
U$84  [#GND#0]  95.5,49.15 0 bottom
U$85  [#1V#A#0]  109.98,52.2 0 top
U$86  [#1V#A#0]  105.54,49.15 0 bottom
U$87  [USB0]  100.33,44.83 0 bottom
U$88  [CURRENT0]  100.33,42.93 0 bottom
U$89  [SENSOR0]  100.33,41.02 0 bottom
U$90  [IN0]  90.17,42.93 90 bottom
U$91  [OUT0]  110.49,42.93 270 bottom
U$92  SPARKX-LOGO4  [SPARKX-MEDIUM]  135.89,35.31 0 bottom
U$93  [#PWR#0]  125.86,33.78 0 top
U$94  [#LED#0]  126.11,36.7 0 bottom
U$95  SPARKX-LOGO4  [SPARKX-MEDIUM]  135.89,35.31 0 top
U$96  [#GND#0]  126.62,52.2 0 top
U$97  [#GND#0]  131.06,49.15 0 bottom
U$98  [#1V#A#0]  145.54,52.2 0 top
U$99  [#1V#A#0]  141.1,49.15 0 bottom
U$100  [USB0]  135.89,44.83 0 bottom
U$101  [CURRENT0]  135.89,42.93 0 bottom
U$102  [SENSOR0]  135.89,41.02 0 bottom
U$103  [IN0]  125.73,42.93 90 bottom
U$104  [OUT0]  146.05,42.93 270 bottom
U$105  SPARKX-LOGO4  [SPARKX-MEDIUM]  29.21,61.21 0 bottom
U$106  [#PWR#0]  19.18,59.69 0 top
U$107  [#LED#0]  19.43,62.61 0 bottom
U$108  SPARKX-LOGO4  [SPARKX-MEDIUM]  29.21,61.21 0 top
U$109  [#GND#0]  19.94,78.11 0 top
U$110  [#GND#0]  24.38,75.06 0 bottom
U$111  [#1V#A#0]  38.86,78.11 0 top
U$112  [#1V#A#0]  34.42,75.06 0 bottom
U$113  [USB0]  29.21,70.74 0 bottom
U$114  [CURRENT0]  29.21,68.83 0 bottom
U$115  [SENSOR0]  29.21,66.93 0 bottom
U$116  [IN0]  19.05,68.83 90 bottom
U$117  [OUT0]  39.37,68.83 270 bottom
U$118  SPARKX-LOGO4  [SPARKX-MEDIUM]  64.77,61.21 0 bottom
U$119  [#PWR#0]  54.74,59.69 0 top
U$120  [#LED#0]  54.99,62.61 0 bottom
U$121  SPARKX-LOGO4  [SPARKX-MEDIUM]  64.77,61.21 0 top
U$122  [#GND#0]  55.5,78.11 0 top
U$123  [#GND#0]  59.94,75.06 0 bottom
U$124  [#1V#A#0]  74.42,78.11 0 top
U$125  [#1V#A#0]  69.98,75.06 0 bottom
U$126  [USB0]  64.77,70.74 0 bottom
U$127  [CURRENT0]  64.77,68.83 0 bottom
U$128  [SENSOR0]  64.77,66.93 0 bottom
U$129  [IN0]  54.61,68.83 90 bottom
U$130  [OUT0]  74.93,68.83 270 bottom
U$131  SPARKX-LOGO4  [SPARKX-MEDIUM]  100.33,61.21 0 bottom
U$132  [#PWR#0]  90.3,59.69 0 top
U$133  [#LED#0]  90.55,62.61 0 bottom
U$134  SPARKX-LOGO4  [SPARKX-MEDIUM]  100.33,61.21 0 top
U$135  [#GND#0]  91.06,78.11 0 top
U$136  [#GND#0]  95.5,75.06 0 bottom
U$137  [#1V#A#0]  109.98,78.11 0 top
U$138  [#1V#A#0]  105.54,75.06 0 bottom
U$139  [USB0]  100.33,70.74 0 bottom
U$140  [CURRENT0]  100.33,68.83 0 bottom
U$141  [SENSOR0]  100.33,66.93 0 bottom
U$142  [IN0]  90.17,68.83 90 bottom
U$143  [OUT0]  110.49,68.83 270 bottom
U$144  SPARKX-LOGO4  [SPARKX-MEDIUM]  135.89,61.21 0 bottom
U$145  [#PWR#0]  125.86,59.69 0 top
U$146  [#LED#0]  126.11,62.61 0 bottom
U$147  SPARKX-LOGO4  [SPARKX-MEDIUM]  135.89,61.21 0 top
U$148  [#GND#0]  126.62,78.11 0 top
U$149  [#GND#0]  131.06,75.06 0 bottom
U$150  [#1V#A#0]  145.54,78.11 0 top
U$151  [#1V#A#0]  141.1,75.06 0 bottom
U$152  [USB0]  135.89,70.74 0 bottom
U$153  [CURRENT0]  135.89,68.83 0 bottom
U$154  [SENSOR0]  135.89,66.93 0 bottom
U$155  [IN0]  125.73,68.83 90 bottom
U$156  [OUT0]  146.05,68.83 270 bottom
U$157  SPARKX-LOGO4  [SPARKX-MEDIUM]  29.21,87.12 0 bottom
U$158  [#PWR#0]  19.18,85.6 0 top
U$159  [#LED#0]  19.43,88.52 0 bottom
U$160  SPARKX-LOGO4  [SPARKX-MEDIUM]  29.21,87.12 0 top
U$161  [#GND#0]  19.94,104.01 0 top
U$162  [#GND#0]  24.38,100.97 0 bottom
U$163  [#1V#A#0]  38.86,104.01 0 top
U$164  [#1V#A#0]  34.42,100.97 0 bottom
U$165  [USB0]  29.21,96.65 0 bottom
U$166  [CURRENT0]  29.21,94.74 0 bottom
U$167  [SENSOR0]  29.21,92.84 0 bottom
U$168  [IN0]  19.05,94.74 90 bottom
U$169  [OUT0]  39.37,94.74 270 bottom
U$170  SPARKX-LOGO4  [SPARKX-MEDIUM]  64.77,87.12 0 bottom
U$171  [#PWR#0]  54.74,85.6 0 top
U$172  [#LED#0]  54.99,88.52 0 bottom
U$173  SPARKX-LOGO4  [SPARKX-MEDIUM]  64.77,87.12 0 top
U$174  [#GND#0]  55.5,104.01 0 top
U$175  [#GND#0]  59.94,100.97 0 bottom
U$176  [#1V#A#0]  74.42,104.01 0 top
U$177  [#1V#A#0]  69.98,100.97 0 bottom
U$178  [USB0]  64.77,96.65 0 bottom
U$179  [CURRENT0]  64.77,94.74 0 bottom
U$180  [SENSOR0]  64.77,92.84 0 bottom
U$181  [IN0]  54.61,94.74 90 bottom
U$182  [OUT0]  74.93,94.74 270 bottom
U$183  SPARKX-LOGO4  [SPARKX-MEDIUM]  100.33,87.12 0 bottom
U$184  [#PWR#0]  90.3,85.6 0 top
U$185  [#LED#0]  90.55,88.52 0 bottom
U$186  SPARKX-LOGO4  [SPARKX-MEDIUM]  100.33,87.12 0 top
U$187  [#GND#0]  91.06,104.01 0 top
U$188  [#GND#0]  95.5,100.97 0 bottom
U$189  [#1V#A#0]  109.98,104.01 0 top
U$190  [#1V#A#0]  105.54,100.97 0 bottom
U$191  [USB0]  100.33,96.65 0 bottom
U$192  [CURRENT0]  100.33,94.74 0 bottom
U$193  [SENSOR0]  100.33,92.84 0 bottom
U$194  [IN0]  90.17,94.74 90 bottom
U$195  [OUT0]  110.49,94.74 270 bottom
U$196  SPARKX-LOGO4  [SPARKX-MEDIUM]  135.89,87.12 0 bottom
U$197  [#PWR#0]  125.86,85.6 0 top
U$198  [#LED#0]  126.11,88.52 0 bottom
U$199  SPARKX-LOGO4  [SPARKX-MEDIUM]  135.89,87.12 0 top
U$200  [#GND#0]  126.62,104.01 0 top
U$201  [#GND#0]  131.06,100.97 0 bottom
U$202  [#1V#A#0]  145.54,104.01 0 top
U$203  [#1V#A#0]  141.1,100.97 0 bottom
U$204  [USB0]  135.89,96.65 0 bottom
U$205  [CURRENT0]  135.89,94.74 0 bottom
U$206  [SENSOR0]  135.89,92.84 0 bottom
U$207  [IN0]  125.73,94.74 90 bottom
U$208  [OUT0]  146.05,94.74 270 bottom
U$209  SPARKX-LOGO4  [SPARKX-MEDIUM]  29.21,113.03 0 bottom
U$210  [#PWR#0]  19.18,111.51 0 top
U$211  [#LED#0]  19.43,114.43 0 bottom
U$212  SPARKX-LOGO4  [SPARKX-MEDIUM]  29.21,113.03 0 top
U$213  [#GND#0]  19.94,129.92 0 top
U$214  [#GND#0]  24.38,126.87 0 bottom
U$215  [#1V#A#0]  38.86,129.92 0 top
U$216  [#1V#A#0]  34.42,126.87 0 bottom
U$217  [USB0]  29.21,122.56 0 bottom
U$218  [CURRENT0]  29.21,120.65 0 bottom
U$219  [SENSOR0]  29.21,118.75 0 bottom
U$220  [IN0]  19.05,120.65 90 bottom
U$221  [OUT0]  39.37,120.65 270 bottom
U$222  SPARKX-LOGO4  [SPARKX-MEDIUM]  64.77,113.03 0 bottom
U$223  [#PWR#0]  54.74,111.51 0 top
U$224  [#LED#0]  54.99,114.43 0 bottom
U$225  SPARKX-LOGO4  [SPARKX-MEDIUM]  64.77,113.03 0 top
U$226  [#GND#0]  55.5,129.92 0 top
U$227  [#GND#0]  59.94,126.87 0 bottom
U$228  [#1V#A#0]  74.42,129.92 0 top
U$229  [#1V#A#0]  69.98,126.87 0 bottom
U$230  [USB0]  64.77,122.56 0 bottom
U$231  [CURRENT0]  64.77,120.65 0 bottom
U$232  [SENSOR0]  64.77,118.75 0 bottom
U$233  [IN0]  54.61,120.65 90 bottom
U$234  [OUT0]  74.93,120.65 270 bottom
U$235  SPARKX-LOGO4  [SPARKX-MEDIUM]  100.33,113.03 0 bottom
U$236  [#PWR#0]  90.3,111.51 0 top
U$237  [#LED#0]  90.55,114.43 0 bottom
U$238  SPARKX-LOGO4  [SPARKX-MEDIUM]  100.33,113.03 0 top
U$239  [#GND#0]  91.06,129.92 0 top
U$240  [#GND#0]  95.5,126.87 0 bottom
U$241  [#1V#A#0]  109.98,129.92 0 top
U$242  [#1V#A#0]  105.54,126.87 0 bottom
U$243  [USB0]  100.33,122.56 0 bottom
U$244  [CURRENT0]  100.33,120.65 0 bottom
U$245  [SENSOR0]  100.33,118.75 0 bottom
U$246  [IN0]  90.17,120.65 90 bottom
U$247  [OUT0]  110.49,120.65 270 bottom
U$248  SPARKX-LOGO4  [SPARKX-MEDIUM]  135.89,113.03 0 bottom
U$249  [#PWR#0]  125.86,111.51 0 top
U$250  [#LED#0]  126.11,114.43 0 bottom
U$251  SPARKX-LOGO4  [SPARKX-MEDIUM]  135.89,113.03 0 top
U$252  [#GND#0]  126.62,129.92 0 top
U$253  [#GND#0]  131.06,126.87 0 bottom
U$254  [#1V#A#0]  145.54,129.92 0 top
U$255  [#1V#A#0]  141.1,126.87 0 bottom
U$256  [USB0]  135.89,122.56 0 bottom
U$257  [CURRENT0]  135.89,120.65 0 bottom
U$258  [SENSOR0]  135.89,118.75 0 bottom
U$259  [IN0]  125.73,120.65 90 bottom
U$260  [OUT0]  146.05,120.65 270 bottom

## Library data of the parts
1V/A 1V/A1-1V/A19 GND GND1-GND19 J3-J6 J9 J10 J13 J14 J17 J18 J21 J22 J25 J26 J29 J30 J33 J34 J37 J38 J41 J42 J45 J46 J49 J50 J53 J54 J57 J58 J61 J62 J65 J66 J69 J70 J73 J74 J77 J78 = SparkFun-Connectors
C1-C20 = SparkFun-Capacitors; PROD_ID: CAP-00810
D1-D20 = SparkFun-LED; PROD_ID: DIO-00819
E$1-E$4 JP1 JP2 JP5 JP6 JP9-JP12 JP15-JP18 JP21-JP24 JP27-JP30 JP33-JP36 JP39-JP42 JP45-JP48 JP51-JP54 JP57-JP60 JP63-JP66 JP69-JP72 JP75-JP78 JP81-JP84 JP87-JP90 JP93-JP96 JP99-JP102 JP105-JP108 JP111-JP114 JP117-JP120 LOGO1-LOGO20 = SparkFun-Aesthetics
E$5 E$6 = SparkFun-Retired
F1-F20 = SparkFun-Fuses; PROD_ID: RES-14313
J1 J7 J11 J15 J19 J23 J27 J31 J35 J39 J43 J47 J51 J55 J59 J63 J67 J71 J75 J79 = SparkFun-Connectors; PROD_ID: CONN-14122
J2 J8 J12 J16 J20 J24 J28 J32 J36 J40 J44 J48 J52 J56 J60 J64 J68 J72 J76 J80 = SparkFun-Connectors; PROD_ID: CONN-09520; SF_ID: PRT-09011
JP3 JP4 JP7 JP8 JP13 JP14 JP19 JP20 JP25 JP26 JP31 JP32 JP37 JP38 JP43 JP44 JP49 JP50 JP55 JP56 JP61 JP62 JP67 JP68 JP73 JP74 JP79 JP80 JP85 JP86 JP91 JP92 JP97 JP98 JP103 JP104 JP109 JP110 JP115 JP116 = SparkFun-Hardware
LED LED1-LED19 = SparkFun-Jumpers
R1 R5 R9 R13 R17 R21 R25 R29 R33 R37 R41 R45 R49 R53 R57 R61 R65 R69 R73 R77 = SparkFun-Resistors; PROD_ID: RES-08272
R2 R6 R10 R14 R18 R22 R26 R30 R34 R38 R42 R46 R50 R54 R58 R62 R66 R70 R74 R78 = SparkFun-Resistors; PROD_ID: RES-12535
R3 R4 R7 R8 R11 R12 R15 R16 R19 R20 R23 R24 R27 R28 R31 R32 R35 R36 R39 R40 R43 R44 R47 R48 R51 R52 R55 R56 R59 R60 R63 R64 R67 R68 R71 R72 R75 R76 R79 R80 = SparkFun-Resistors; PROD_ID: RES-12083
U1-U20 = New_Parts; PROD_ID: COM-17044
U$1 U$2 U$12 U$17 U$27 U$30 U$40 U$43 U$53 U$56 U$66 U$69 U$79 U$82 U$92 U$95 U$105 U$108 U$118 U$121 U$131 U$134 U$144 U$147 U$157 U$160 U$170 U$173 U$183 U$186 U$196 U$199 U$209 U$212 U$222 U$225 U$235 U$238 U$248 U$251 = SparkX
U$3-U$11 U$13-U$16 U$18-U$26 U$28 U$29 U$31-U$39 U$41 U$42 U$44-U$52 U$54 U$55 U$57-U$65 U$67 U$68 U$70-U$78 U$80 U$81 U$83-U$91 U$93 U$94 U$96-U$104 U$106 U$107 U$109-U$117 U$119 U$120 U$122-U$130 U$132 U$133 U$135-U$143 U$145 U$146 U$148-U$156 U$158 U$159 U$161-U$169 U$171 U$172 U$174-U$182 U$184 U$185 U$187-U$195 U$197 U$198 U$200-U$208 U$210 U$211 U$213-U$221 U$223 U$224 U$226-U$234 U$236 U$237 U$239-U$247 U$249 U$250 U$252-U$260 = output

## Nets
1V/A: 1V/A.1 J3.P1 U1.1
1V/A1: 1V/A1.1 J5.P1 U2.1
1V/A2: 1V/A2.1 J9.P1 U3.1
1V/A3: 1V/A3.1 J13.P1 U4.1
1V/A4: 1V/A4.1 J17.P1 U5.1
1V/A5: 1V/A5.1 J21.P1 U6.1
1V/A6: 1V/A6.1 J25.P1 U7.1
1V/A7: 1V/A7.1 J29.P1 U8.1
1V/A8: 1V/A8.1 J33.P1 U9.1
1V/A9: 1V/A9.1 J37.P1 U10.1
1V/A10: 1V/A10.1 J41.P1 U11.1
1V/A11: 1V/A11.1 J45.P1 U12.1
1V/A12: 1V/A12.1 J49.P1 U13.1
1V/A13: 1V/A13.1 J53.P1 U14.1
1V/A14: 1V/A14.1 J57.P1 U15.1
1V/A15: 1V/A15.1 J61.P1 U16.1
1V/A16: 1V/A16.1 J65.P1 U17.1
1V/A17: 1V/A17.1 J69.P1 U18.1
1V/A18: 1V/A18.1 J73.P1 U19.1
1V/A19: 1V/A19.1 J77.P1 U20.1
5V: C1.1 F2.2 LED.2 R2.2 U1.3 U1.4
5V1: C2.1 F1.2 LED1.2 R6.2 U2.3 U2.4
5V2: C3.1 F3.2 LED2.2 R10.2 U3.3 U3.4
5V3: C4.1 F4.2 LED3.2 R14.2 U4.3 U4.4
5V4: C5.1 F5.2 LED4.2 R18.2 U5.3 U5.4
5V5: C6.1 F6.2 LED5.2 R22.2 U6.3 U6.4
5V6: C7.1 F7.2 LED6.2 R26.2 U7.3 U7.4
5V7: C8.1 F8.2 LED7.2 R30.2 U8.3 U8.4
5V8: C9.1 F9.2 LED8.2 R34.2 U9.3 U9.4
5V9: C10.1 F10.2 LED9.2 R38.2 U10.3 U10.4
5V10: C11.1 F11.2 LED10.2 R42.2 U11.3 U11.4
5V11: C12.1 F12.2 LED11.2 R46.2 U12.3 U12.4
5V12: C13.1 F13.2 LED12.2 R50.2 U13.3 U13.4
5V13: C14.1 F14.2 LED13.2 R54.2 U14.3 U14.4
5V14: C15.1 F15.2 LED14.2 R58.2 U15.3 U15.4
5V15: C16.1 F16.2 LED15.2 R62.2 U16.3 U16.4
5V16: C17.1 F17.2 LED16.2 R66.2 U17.3 U17.4
5V17: C18.1 F18.2 LED17.2 R70.2 U18.3 U18.4
5V18: C19.1 F19.2 LED18.2 R74.2 U19.3 U19.4
5V19: C20.1 F20.2 LED19.2 R78.2 U20.3 U20.4
GND: C1.2 D1.C GND.1 J1.GND J1.GND2 J2.GND J4.P1 R3.1 R4.1 U1.2
GND1: C2.2 D2.C GND1.1 J6.P1 J7.GND J7.GND2 J8.GND R7.1 R8.1 U2.2
GND2: C3.2 D3.C GND2.1 J10.P1 J11.GND J11.GND2 J12.GND R11.1 R12.1 U3.2
GND3: C4.2 D4.C GND3.1 J14.P1 J15.GND J15.GND2 J16.GND R15.1 R16.1 U4.2
GND4: C5.2 D5.C GND4.1 J18.P1 J19.GND J19.GND2 J20.GND R19.1 R20.1 U5.2
GND5: C6.2 D6.C GND5.1 J22.P1 J23.GND J23.GND2 J24.GND R23.1 R24.1 U6.2
GND6: C7.2 D7.C GND6.1 J26.P1 J27.GND J27.GND2 J28.GND R27.1 R28.1 U7.2
GND7: C8.2 D8.C GND7.1 J30.P1 J31.GND J31.GND2 J32.GND R31.1 R32.1 U8.2
GND8: C9.2 D9.C GND8.1 J34.P1 J35.GND J35.GND2 J36.GND R35.1 R36.1 U9.2
GND9: C10.2 D10.C GND9.1 J38.P1 J39.GND J39.GND2 J40.GND R39.1 R40.1 U10.2
GND10: C11.2 D11.C GND10.1 J42.P1 J43.GND J43.GND2 J44.GND R43.1 R44.1 U11.2
GND11: C12.2 D12.C GND11.1 J46.P1 J47.GND J47.GND2 J48.GND R47.1 R48.1 U12.2
GND12: C13.2 D13.C GND12.1 J50.P1 J51.GND J51.GND2 J52.GND R51.1 R52.1 U13.2
GND13: C14.2 D14.C GND13.1 J54.P1 J55.GND J55.GND2 J56.GND R55.1 R56.1 U14.2
GND14: C15.2 D15.C GND14.1 J58.P1 J59.GND J59.GND2 J60.GND R59.1 R60.1 U15.2
GND15: C16.2 D16.C GND15.1 J62.P1 J63.GND J63.GND2 J64.GND R63.1 R64.1 U16.2
GND16: C17.2 D17.C GND16.1 J66.P1 J67.GND J67.GND2 J68.GND R67.1 R68.1 U17.2
GND17: C18.2 D18.C GND17.1 J70.P1 J71.GND J71.GND2 J72.GND R71.1 R72.1 U18.2
GND18: C19.2 D19.C GND18.1 J74.P1 J75.GND J75.GND2 J76.GND R75.1 R76.1 U19.2
GND19: C20.2 D20.C GND19.1 J78.P1 J79.GND J79.GND2 J80.GND R79.1 R80.1 U20.2
N$1: D2.A R5.1
N$2: LED1.1 R5.2
N$3: D1.A R1.1
N$4: LED.1 R1.2
N$5: J7.A5 R7.2
N$6: J7.B5 R8.2
N$7: F1.1 J7.VBUS1 J7.VBUS2
N$8: D3.A R9.1
N$9: LED2.1 R9.2
N$10: J1.A5 R3.2
N$11: J1.B5 R4.2
N$12: J11.A5 R11.2
N$13: J11.B5 R12.2
N$14: F3.1 J11.VBUS1 J11.VBUS2
N$15: D4.A R13.1
N$16: LED3.1 R13.2
N$17: J15.A5 R15.2
N$18: J15.B5 R16.2
N$19: F2.1 J1.VBUS1 J1.VBUS2
N$20: F4.1 J15.VBUS1 J15.VBUS2
N$21: D5.A R17.1
N$22: LED4.1 R17.2
N$23: J19.A5 R19.2
N$24: J19.B5 R20.2
N$25: F5.1 J19.VBUS1 J19.VBUS2
N$26: D6.A R21.1
N$27: LED5.1 R21.2
N$28: J23.A5 R23.2
N$29: J23.B5 R24.2
N$30: F6.1 J23.VBUS1 J23.VBUS2
N$31: D7.A R25.1
N$32: LED6.1 R25.2
N$33: J27.A5 R27.2
N$34: J27.B5 R28.2
N$35: F7.1 J27.VBUS1 J27.VBUS2
N$36: D8.A R29.1
N$37: LED7.1 R29.2
N$38: J31.A5 R31.2
N$39: J31.B5 R32.2
N$40: F8.1 J31.VBUS1 J31.VBUS2
N$41: D9.A R33.1
N$42: LED8.1 R33.2
N$43: J35.A5 R35.2
N$44: J35.B5 R36.2
N$45: F9.1 J35.VBUS1 J35.VBUS2
N$46: D10.A R37.1
N$47: LED9.1 R37.2
N$48: J39.A5 R39.2
N$49: J39.B5 R40.2
N$50: F10.1 J39.VBUS1 J39.VBUS2
N$51: D11.A R41.1
N$52: LED10.1 R41.2
N$53: J43.A5 R43.2
N$54: J43.B5 R44.2
N$55: F11.1 J43.VBUS1 J43.VBUS2
N$56: D12.A R45.1
N$57: LED11.1 R45.2
N$58: J47.A5 R47.2
N$59: J47.B5 R48.2
N$60: F12.1 J47.VBUS1 J47.VBUS2
N$61: D13.A R49.1
N$62: LED12.1 R49.2
N$63: J51.A5 R51.2
N$64: J51.B5 R52.2
N$65: F13.1 J51.VBUS1 J51.VBUS2
N$66: D14.A R53.1
N$67: LED13.1 R53.2
N$68: J55.A5 R55.2
N$69: J55.B5 R56.2
N$70: F14.1 J55.VBUS1 J55.VBUS2
N$71: D15.A R57.1
N$72: LED14.1 R57.2
N$73: J59.A5 R59.2
N$74: J59.B5 R60.2
N$75: F15.1 J59.VBUS1 J59.VBUS2
N$76: D16.A R61.1
N$77: LED15.1 R61.2
N$78: J63.A5 R63.2
N$79: J63.B5 R64.2
N$80: F16.1 J63.VBUS1 J63.VBUS2
N$81: D17.A R65.1
N$82: LED16.1 R65.2
N$83: J67.A5 R67.2
N$84: J67.B5 R68.2
N$85: F17.1 J67.VBUS1 J67.VBUS2
N$86: D18.A R69.1
N$87: LED17.1 R69.2
N$88: J71.A5 R71.2
N$89: J71.B5 R72.2
N$90: F18.1 J71.VBUS1 J71.VBUS2
N$91: D19.A R73.1
N$92: LED18.1 R73.2
N$93: J75.A5 R75.2
N$94: J75.B5 R76.2
N$95: F19.1 J75.VBUS1 J75.VBUS2
N$96: D20.A R77.1
N$97: LED19.1 R77.2
N$98: J79.A5 R79.2
N$99: J79.B5 R80.2
N$100: F20.1 J79.VBUS1 J79.VBUS2
SHLD: J1.SHLD1 J1.SHLD2 J1.SHLD3 J1.SHLD4 J2.SHLD1 J2.SHLD2
SHLD1: J7.SHLD1 J7.SHLD2 J7.SHLD3 J7.SHLD4 J8.SHLD1 J8.SHLD2
SHLD2: J11.SHLD1 J11.SHLD2 J11.SHLD3 J11.SHLD4 J12.SHLD1 J12.SHLD2
SHLD3: J15.SHLD1 J15.SHLD2 J15.SHLD3 J15.SHLD4 J16.SHLD1 J16.SHLD2
SHLD4: J19.SHLD1 J19.SHLD2 J19.SHLD3 J19.SHLD4 J20.SHLD1 J20.SHLD2
SHLD5: J23.SHLD1 J23.SHLD2 J23.SHLD3 J23.SHLD4 J24.SHLD1 J24.SHLD2
SHLD6: J27.SHLD1 J27.SHLD2 J27.SHLD3 J27.SHLD4 J28.SHLD1 J28.SHLD2
SHLD7: J31.SHLD1 J31.SHLD2 J31.SHLD3 J31.SHLD4 J32.SHLD1 J32.SHLD2
SHLD8: J35.SHLD1 J35.SHLD2 J35.SHLD3 J35.SHLD4 J36.SHLD1 J36.SHLD2
SHLD9: J39.SHLD1 J39.SHLD2 J39.SHLD3 J39.SHLD4 J40.SHLD1 J40.SHLD2
SHLD10: J43.SHLD1 J43.SHLD2 J43.SHLD3 J43.SHLD4 J44.SHLD1 J44.SHLD2
SHLD11: J47.SHLD1 J47.SHLD2 J47.SHLD3 J47.SHLD4 J48.SHLD1 J48.SHLD2
SHLD12: J51.SHLD1 J51.SHLD2 J51.SHLD3 J51.SHLD4 J52.SHLD1 J52.SHLD2
SHLD13: J55.SHLD1 J55.SHLD2 J55.SHLD3 J55.SHLD4 J56.SHLD1 J56.SHLD2
SHLD14: J59.SHLD1 J59.SHLD2 J59.SHLD3 J59.SHLD4 J60.SHLD1 J60.SHLD2
SHLD15: J63.SHLD1 J63.SHLD2 J63.SHLD3 J63.SHLD4 J64.SHLD1 J64.SHLD2
SHLD16: J67.SHLD1 J67.SHLD2 J67.SHLD3 J67.SHLD4 J68.SHLD1 J68.SHLD2
SHLD17: J71.SHLD1 J71.SHLD2 J71.SHLD3 J71.SHLD4 J72.SHLD1 J72.SHLD2
SHLD18: J75.SHLD1 J75.SHLD2 J75.SHLD3 J75.SHLD4 J76.SHLD1 J76.SHLD2
SHLD19: J79.SHLD1 J79.SHLD2 J79.SHLD3 J79.SHLD4 J80.SHLD1 J80.SHLD2
USB_D+: J1.A6 J1.B6 J2.D+
USB_D+1: J7.A6 J7.B6 J8.D+
USB_D+2: J11.A6 J11.B6 J12.D+
USB_D+3: J15.A6 J15.B6 J16.D+
USB_D+4: J19.A6 J19.B6 J20.D+
USB_D+5: J23.A6 J23.B6 J24.D+
USB_D+6: J27.A6 J27.B6 J28.D+
USB_D+7: J31.A6 J31.B6 J32.D+
USB_D+8: J35.A6 J35.B6 J36.D+
USB_D+9: J39.A6 J39.B6 J40.D+
USB_D+10: J43.A6 J43.B6 J44.D+
USB_D+11: J47.A6 J47.B6 J48.D+
USB_D+12: J51.A6 J51.B6 J52.D+
USB_D+13: J55.A6 J55.B6 J56.D+
USB_D+14: J59.A6 J59.B6 J60.D+
USB_D+15: J63.A6 J63.B6 J64.D+
USB_D+16: J67.A6 J67.B6 J68.D+
USB_D+17: J71.A6 J71.B6 J72.D+
USB_D+18: J75.A6 J75.B6 J76.D+
USB_D+19: J79.A6 J79.B6 J80.D+
USB_D-: J1.A7 J1.B7 J2.D-
USB_D-1: J7.A7 J7.B7 J8.D-
USB_D-2: J11.A7 J11.B7 J12.D-
USB_D-3: J15.A7 J15.B7 J16.D-
USB_D-4: J19.A7 J19.B7 J20.D-
USB_D-5: J23.A7 J23.B7 J24.D-
USB_D-6: J27.A7 J27.B7 J28.D-
USB_D-7: J31.A7 J31.B7 J32.D-
USB_D-8: J35.A7 J35.B7 J36.D-
USB_D-9: J39.A7 J39.B7 J40.D-
USB_D-10: J43.A7 J43.B7 J44.D-
USB_D-11: J47.A7 J47.B7 J48.D-
USB_D-12: J51.A7 J51.B7 J52.D-
USB_D-13: J55.A7 J55.B7 J56.D-
USB_D-14: J59.A7 J59.B7 J60.D-
USB_D-15: J63.A7 J63.B7 J64.D-
USB_D-16: J67.A7 J67.B7 J68.D-
USB_D-17: J71.A7 J71.B7 J72.D-
USB_D-18: J75.A7 J75.B7 J76.D-
USB_D-19: J79.A7 J79.B7 J80.D-
VOUT: J2.VBUS R2.1 U1.5
VOUT1: J8.VBUS R6.1 U2.5
VOUT2: J12.VBUS R10.1 U3.5
VOUT3: J16.VBUS R14.1 U4.5
VOUT4: J20.VBUS R18.1 U5.5
VOUT5: J24.VBUS R22.1 U6.5
VOUT6: J28.VBUS R26.1 U7.5
VOUT7: J32.VBUS R30.1 U8.5
VOUT8: J36.VBUS R34.1 U9.5
VOUT9: J40.VBUS R38.1 U10.5
VOUT10: J44.VBUS R42.1 U11.5
VOUT11: J48.VBUS R46.1 U12.5
VOUT12: J52.VBUS R50.1 U13.5
VOUT13: J56.VBUS R54.1 U14.5
VOUT14: J60.VBUS R58.1 U15.5
VOUT15: J64.VBUS R62.1 U16.5
VOUT16: J68.VBUS R66.1 U17.5
VOUT17: J72.VBUS R70.1 U18.5
VOUT18: J76.VBUS R74.1 U19.5
VOUT19: J80.VBUS R78.1 U20.5